# Altium PCB ROS_CAR.PcbDoc (part 5 of 13)
Units mil, origin at the board's own origin, x right, y up, seen from the top; angles counter-clockwise.
Board outline 3937.01 x 3937.01 mil, 2 copper layers (Top Layer, Bottom Layer); 201 components, 155 nets, 998 pads, 0 vias.
Unrouted connection lines stored in the file: 3.
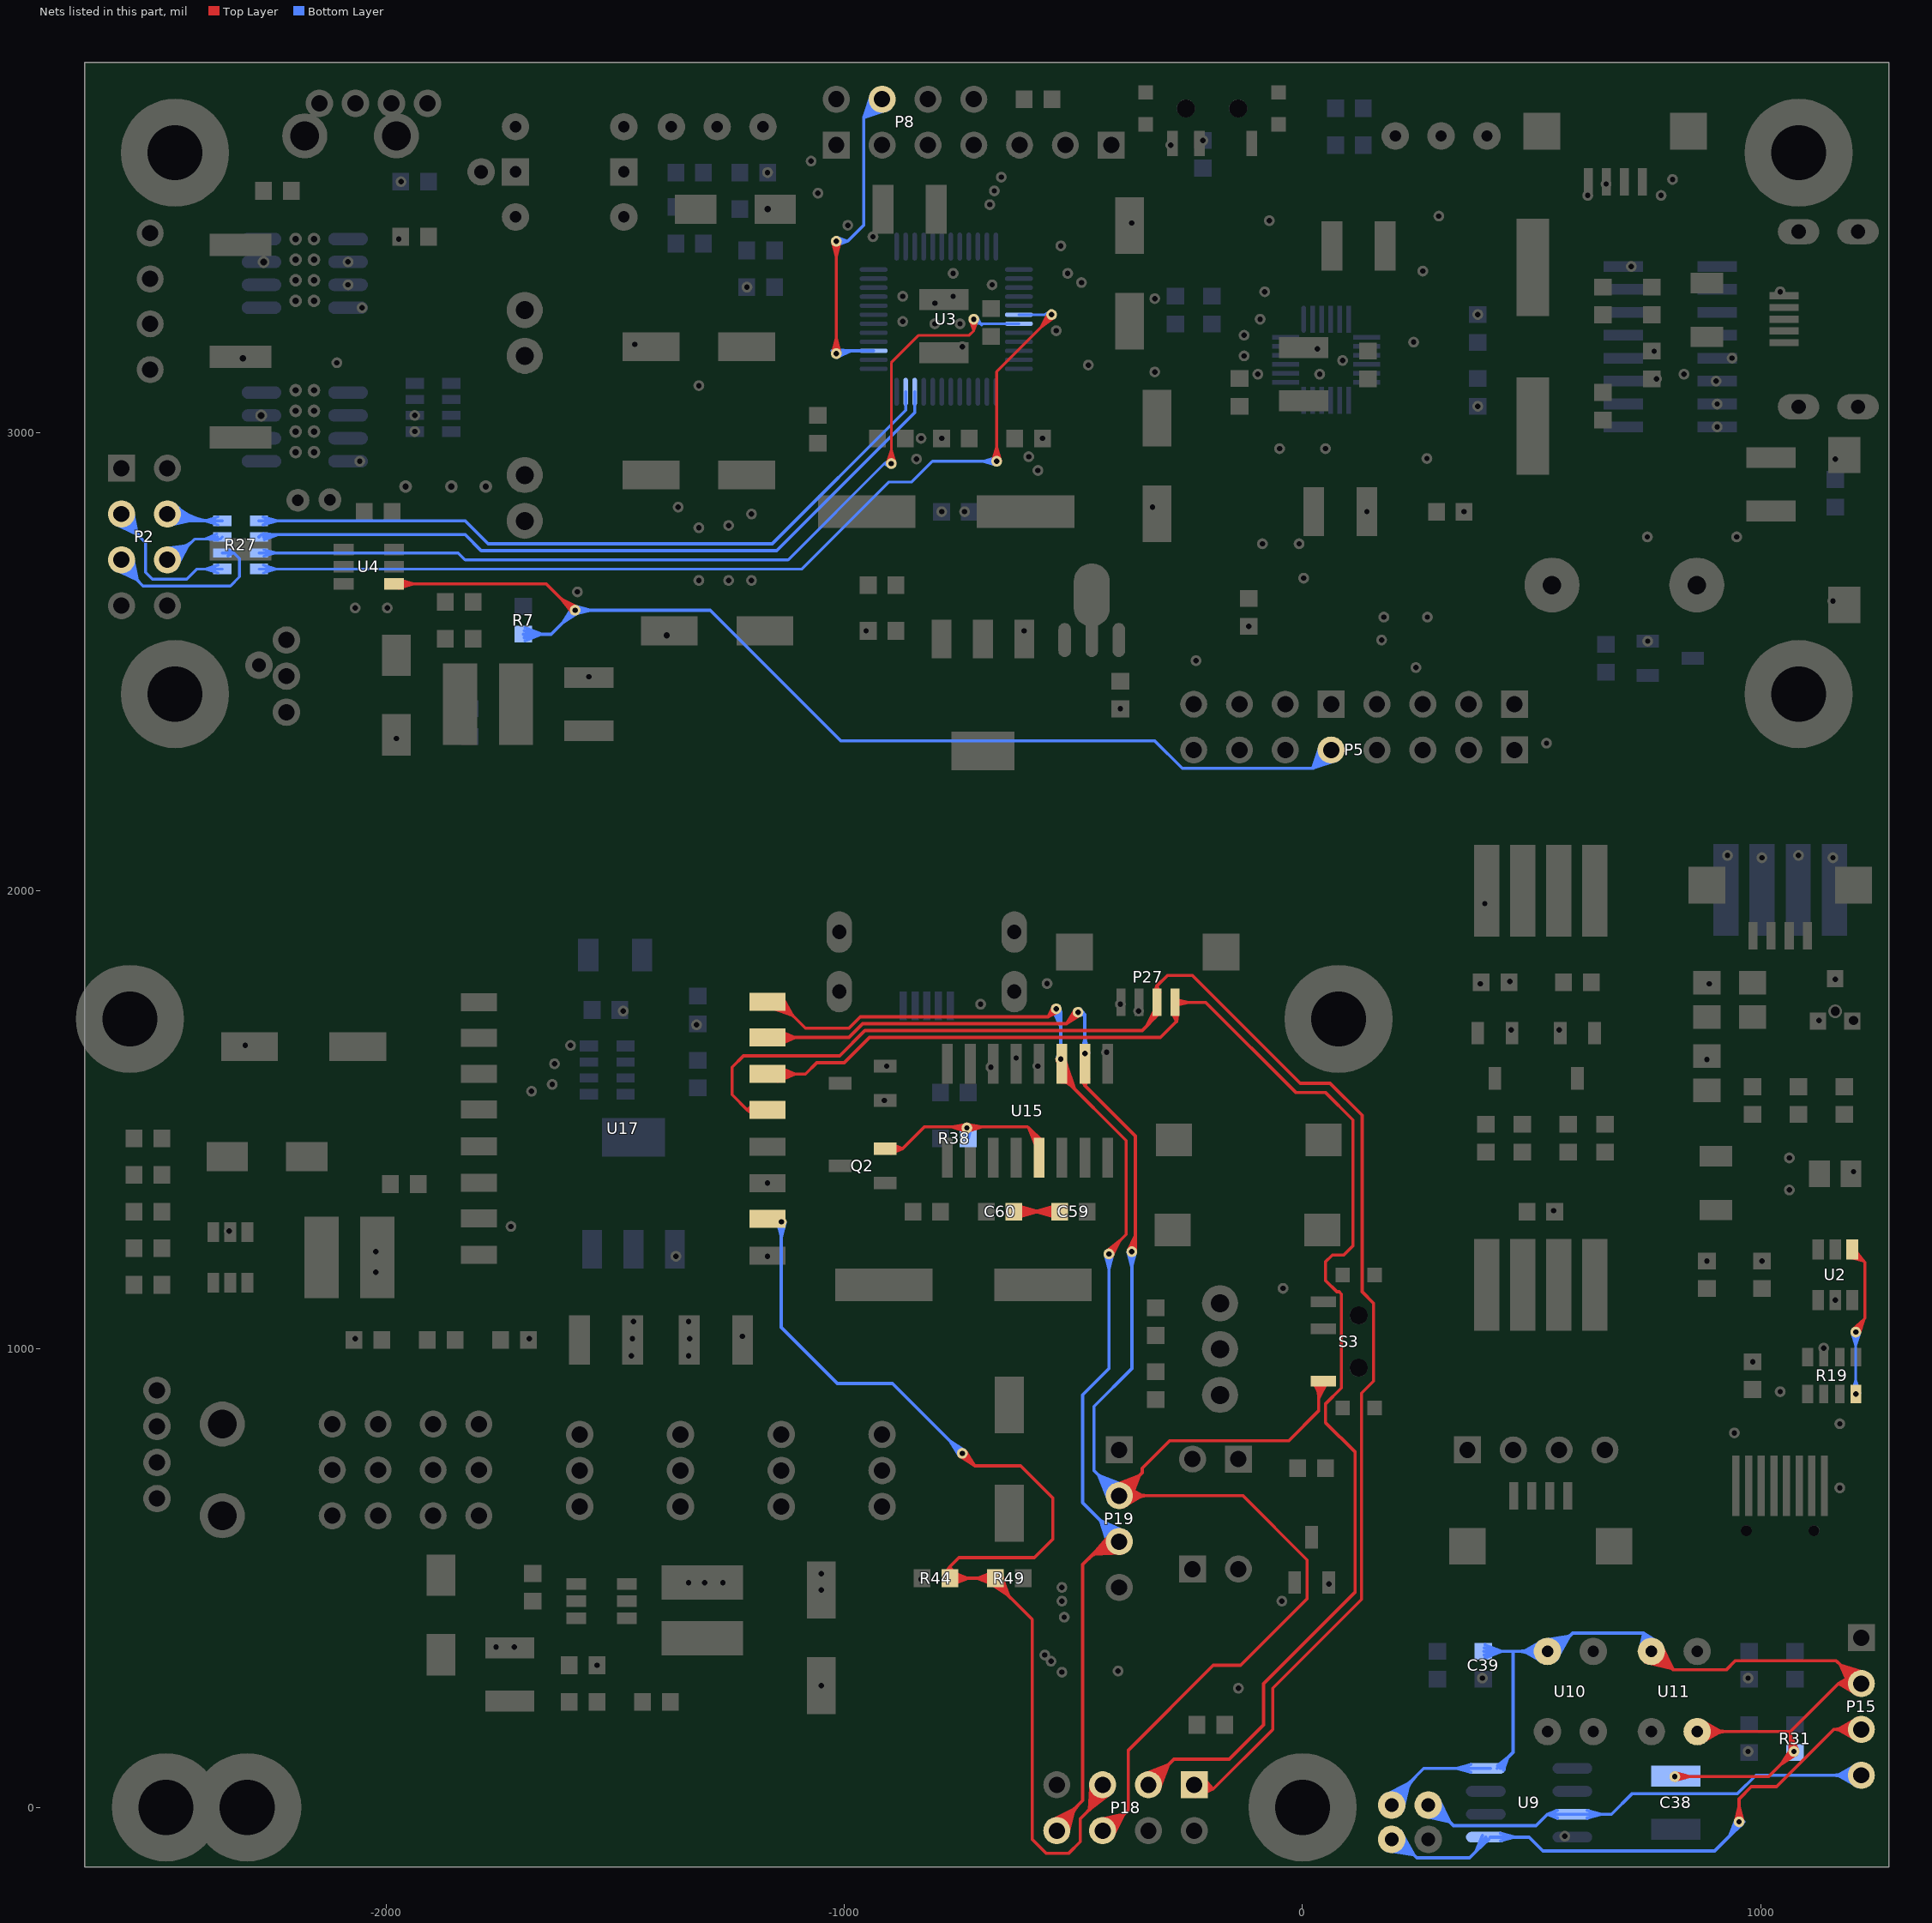
[diagram p5: the nets of this part, all layers, seen from the top]

## Nets (pads, with @x,y where several pads share a name; then routed paths per layer and width w, separated by ;. In a path a pad name is that pad's centre, name@x,y a point inside that pad or via, vN(x,y) a via of type N, cw(c..) or ccw(c..) an arc to the next point about the centre after c; other vN are vias at no path point) (continued)
CK1: P15.3 pad.0@194.53,-69.92 pad.1@952.84,-31.61 U9.1 | length 3017.9
  Top Layer w7: pad.1@944.6,-30.56 952.84,1.2 pad.1@961.08,-30.56 ; pad.1@946.96,-25.73 ccw(c932.78,-11.54) 952.84,-11.54 ccw(c972.9,-11.54) pad.1@958.72,-25.73 ; pad.1@952.84,-31.61 952.84,18.39 979.53,45.08 1034.53,45.08 1159.53,170.08 ; P15.3@1200.52,152.3 ccw(c1159.53,113.94) 1159.53,170.08 ; P15.3@1200.52,187.86 cw(c1159.53,226.21) 1159.53,170.08 ; P15.3@1205.63,157.08 ccw(c1175.67,129.04) 1175.67,170.08 ccw(c1175.67,211.12) P15.3@1205.63,183.08 ; P15.3@1212.82,144.93 1169,170.08 ; P15.3@1212.82,195.23 1169,170.08 ; P15.3@1215.94,151.39 1169,170.08 ; P15.3@1215.94,188.77 1169,170.08 ; P15.3@1218.1,158.14 1169,170.08 ; P15.3@1218.1,182.02 1169,170.08 ; P15.3@1219.28,165.06 1169,170.08 ; P15.3@1219.28,175.1 1169,170.08 ; P15.3@1219.53,170.08 1169,170.08 ; P15.3@1224.53,170.08 1159.53,170.08
  Bottom Layer w7: pad.0@184.74,-94.55 243.1,-103.49 ; pad.0@186.24,-87.57 243.1,-103.49 ; pad.0@188.55,-80.9 243.1,-103.49 ; pad.0@191.61,-74.59 243.1,-103.49 ; pad.0@194.53,-69.92 243.1,-103.49 ; pad.0@195.1,-75.39 cw(c199.08,-113.12) 225.9,-86.29 ; pad.0@195.84,-82.35 cw(c201.05,-131.89) 236.28,-96.67 ; pad.0@196.57,-89.31 cw(c203.03,-150.67) 246.65,-107.04 ; pad.0@197.86,-65.55 243.1,-103.49 ; pad.0@202.68,-60.45 243.1,-103.49 ; pad.0@204.53,-69.92 209.53,-69.92 249.53,-109.92 364.53,-109.92 U9.1@404.53,-69.92 ; pad.0@208.11,-55.93 243.1,-103.49 ; pad.0@214.1,-52.06 243.1,-103.49 ; pad.0@221.03,-69.92 ccw(c248.79,-69.92) 229.16,-89.55 ; U9.1@392.72,-60.98 378.79,-95.66 ; U9.1@400.04,-64.92 378.79,-95.66 ; U9.1@406.31,-70.38 378.79,-95.66 ; U9.1@410.04,-64.92 494.53,-64.92 524.53,-94.92 899.53,-94.92 pad.1@962.84,-31.61 ; U9.1@431.54,-64.92 464.35,-64.92 ; U9.1@432.59,-73.17 464.35,-64.92 ; U9.1@432.59,-56.68 464.35,-64.92 ; U9.1@437.41,-70.8 cw(c451.6,-84.99) 451.6,-64.92 cw(c451.6,-44.86) U9.1@437.41,-59.04 ; 931.58,-62.87 ccw(c900.32,-31.61) pad.1@944.53,-31.61 ; 943.53,-50.92 ccw(c924.22,-31.61) pad.1@951.53,-31.61 ; pad.1@945.49,-27.72 931.6,-62.85 ; pad.1@952.84,-31.61 931.6,-62.85 ; pad.1@959.16,-37.01 931.6,-62.85
CK2: P15.4 pad.0@274.53,5.08 U9.7 | length 2544.5
  Bottom Layer w7: pad.0@263.11,-18.84 321.77,-32.16 ; pad.0@265.1,-11.99 321.77,-32.16 ; pad.0@267.85,-5.49 321.77,-32.16 ; pad.0@271.32,0.61 321.77,-32.16 ; pad.0@274.53,5.08 321.77,-32.16 ; pad.0@274.9,-7.42 cw(c276.37,-57.2) 311.59,-21.98 ; pad.0@275.1,-14.41 cw(c277.03,-79.48) 323.06,-33.45 ; pad.0@278.13,9.24 321.77,-32.16 ; pad.0@283.24,14.04 321.77,-32.16 ; pad.0@284.53,5.08 329.53,-39.92 509.53,-39.92 534.53,-14.92 ; pad.0@288.92,18.23 321.77,-32.16 ; pad.0@294.03,5.08 ccw(c316.96,5.08) 300.75,-11.14 ; pad.0@295.11,21.76 321.77,-32.16 ; pad.0@301.03,5.08 ccw(c340.86,5.08) 312.69,-23.09 ; U9.7@551.64,-20.8 ccw(c537.46,-34.99) 537.46,-14.92 ccw(c537.46,5.14) U9.7@551.64,-9.04 ; U9.7@556.02,-23.1 534.53,-14.92 ; U9.7@556.02,-6.75 534.53,-14.92 ; U9.7@557.52,-14.92 534.53,-14.92 ; U9.7@620.51,-14.92 653.32,-14.92 ; U9.7@621.56,-23.17 653.32,-14.92 ; U9.7@621.56,-6.68 653.32,-14.92 ; U9.7@626.39,-20.8 cw(c640.58,-34.99) 640.58,-14.92 cw(c640.58,5.14) U9.7@626.39,-9.04 ; P15.4@1201.12,51.67 ccw(c1156.69,7.24) 1156.69,70.08 ccw(c1156.69,132.91) P15.4@1201.12,88.48 ; P15.4@1206.07,56.62 ccw(c1173.59,24.14) 1173.59,70.08 ccw(c1173.59,116.02) P15.4@1206.07,83.53 ; P15.4@1212.82,44.93 1169,70.08 ; P15.4@1212.82,95.23 1169,70.08 ; P15.4@1215.94,51.39 1169,70.08 ; P15.4@1215.94,88.77 1169,70.08 ; P15.4@1218.1,58.14 1169,70.08 ; P15.4@1218.1,82.02 1169,70.08 ; P15.4@1219.28,65.06 1169,70.08 ; P15.4@1219.28,75.1 1169,70.08 ; P15.4@1219.53,70.08 1169,70.08 ; P15.4@1224.53,70.08 989.53,70.08 949.53,30.08 719.53,30.08 674.53,-14.92 534.53,-14.92
CSN: P8.4 pad.1@-1017.48,3172.09 pad.1@-1017.48,3417.09 U3.15 | length 1841.7
  Top Layer w7: pad.1@-1025.72,3173.14 -1017.48,3204.9 pad.1@-1009.24,3173.14 ; pad.1@-1025.72,3416.03 -1017.48,3384.28 ; pad.1@-1023.36,3177.96 ccw(c-1037.54,3192.15) -1017.48,3192.15 ccw(c-997.42,3192.15) pad.1@-1011.6,3177.96 ; pad.1@-1023.36,3411.21 cw(c-1037.54,3397.02) -1017.48,3397.02 cw(c-997.42,3397.02) pad.1@-1011.6,3411.21 ; pad.1@-1017.48,3172.09 pad.1@-1017.48,3417.09 -1017.48,3384.28 ; pad.1@-1009.24,3416.03 -1017.48,3384.28
  Bottom Layer w7: pad.1@-1026.38,3178.19 U3.15@-935.94,3178.19 ; pad.1@-1017.96,3180.38 -984.02,3178.19 ; pad.1@-1017.48,3172.09 -984.02,3178.19 ; pad.1@-1017.48,3417.09 -992.91,3417.09 ; pad.1@-1016.55,3171.16 cw(c-999.58,3154.19) -999.58,3178.19 ; pad.1@-1016.07,3408.9 -992.91,3417.09 ; pad.1@-1016.07,3425.28 -992.91,3417.09 ; pad.1@-1015,3164.15 -984.02,3178.19 ; pad.1@-1011.6,3166.21 cw(c-982.68,3137.29) -982.68,3178.19 ; pad.1@-1011.6,3411.21 cw(c-997.42,3397.02) -997.42,3417.09 cw(c-997.42,3437.15) pad.1@-1011.6,3422.96 ; -987.46,3178.19 U3.15@-961.53,3178.19 ; P8.4@-943.43,3725.08 cw(c-991.74,3721.35) -957.48,3687.09 ; P8.4@-939.62,3740.76 -957.48,3687.09 ; P8.4@-936.45,3725.62 cw(c-971.77,3722.89) -946.72,3697.85 cw(c-921.67,3672.8) P8.4@-918.95,3708.12 ; P8.4@-933.01,3738.09 -957.48,3687.09 ; P8.4@-926.84,3734.64 -957.48,3687.09 ; P8.4@-921.19,3730.48 -957.48,3687.09 ; P8.4@-919.48,3701.14 ccw(c-923.22,3652.83) -957.48,3687.09 ; P8.4@-914.09,3723.38 -957.48,3687.09 ; P8.4@-909.93,3717.73 -957.48,3687.09 ; P8.4@-906.48,3711.56 -957.48,3687.09 ; P8.4@-903.8,3704.94 -957.48,3687.09 ; -992.91,3417.09 -957.48,3452.52 -957.48,3687.09 ; -957.48,3687.09 P8.4@-917.48,3727.09 -957.48,3687.09
DTR: pad.1@-732.5,1482.5 Q2.2 R38.1 U15.13 | length 2793.5
  Top Layer w7: Q2.2@-910.79,1437.4 -872.6,1437.4 ; -758.6,1485 cw(c-758.6,1456.4) pad.1@-738.38,1476.62 ; -746.53,1485 ccw(c-746.53,1496.53) pad.1@-738.38,1488.38 ; pad.1@-734.16,1474.36 -765.51,1485 ; pad.1@-732.92,1490.8 -765.51,1485 ; pad.1@-732.08,1490.8 -699.47,1485 ; pad.1@-730.84,1474.36 -699.47,1485 ; pad.1@-726.62,1476.62 cw(c-706.4,1456.4) -706.4,1485 ; pad.1@-726.62,1488.38 ccw(c-718.47,1496.53) -718.47,1485 ; -596.87,1481.87 cw(c-629.61,1449.13) U15.13@-583.31,1449.13 ; -584.92,1469.92 cw(c-605.71,1449.13) U15.13@-576.31,1449.13 ; U15.13@-582.34,1445.23 -597.36,1482.36 ; U15.13@-575,1449.13 -597.36,1482.36 ; U15.13@-570,1435 -570,1455 -600,1485 -825,1485 -872.6,1437.4 ; U15.13@-568.62,1454.46 -597.36,1482.36 ; Q2.2@-899.96,1437.4 -872.6,1437.4 ; Q2.2@-899.96,1437.4 -872.6,1437.4 ; Q2.2@-899.96,1437.4 -872.6,1437.4 ; Q2.2@-899.96,1437.4 -872.6,1437.4 ; Q2.2@-899.96,1437.4 -872.6,1437.4 ; Q2.2@-899.96,1437.4 -872.6,1437.4 ; Q2.2@-899.96,1437.4 -872.6,1437.4 ; Q2.2@-899.96,1437.4 -872.6,1437.4 ; Q2.2@-899.96,1437.4 -872.6,1437.4 ; Q2.2@-899.96,1437.4 -872.6,1437.4 ; Q2.2@-899.96,1437.4 -872.6,1437.4 ; Q2.2@-899.96,1437.4 -872.6,1437.4 ; Q2.2@-899.96,1437.4 -872.6,1437.4 ; Q2.2@-899.96,1437.4 -872.6,1437.4 ; Q2.2@-899.96,1437.4 -872.6,1437.4 ; Q2.2@-899.96,1437.4 -872.6,1437.4 ; Q2.2@-899.96,1437.4 -872.6,1437.4 ; Q2.2@-899.96,1437.4 -872.6,1437.4 ; Q2.2@-899.96,1437.4 -872.6,1437.4 ; Q2.2@-899.96,1437.4 -872.6,1437.4 ; Q2.2@-899.96,1437.4 -872.6,1437.4 ; Q2.2@-898.03,1427.31 -872.6,1437.4 ; Q2.2@-898.03,1427.31 -872.6,1437.4 ; Q2.2@-898.03,1427.31 -872.6,1437.4 ; Q2.2@-898.03,1427.31 -872.6,1437.4 ; Q2.2@-898.03,1427.31 -872.6,1437.4 ; Q2.2@-898.03,1427.31 -872.6,1437.4 ; Q2.2@-898.03,1427.31 -872.6,1437.4 ; Q2.2@-898.03,1427.31 -872.6,1437.4 ; Q2.2@-898.03,1427.31 -872.6,1437.4 ; Q2.2@-898.03,1427.31 -872.6,1437.4 ; Q2.2@-898.03,1427.31 -872.6,1437.4 ; Q2.2@-898.03,1427.31 -872.6,1437.4 ; Q2.2@-898.03,1427.31 -872.6,1437.4 ; Q2.2@-898.03,1427.31 -872.6,1437.4 ; Q2.2@-898.03,1427.31 -872.6,1437.4 ; Q2.2@-898.03,1427.31 -872.6,1437.4 ; Q2.2@-898.03,1427.31 -872.6,1437.4 ; Q2.2@-898.03,1427.31 -872.6,1437.4 ; Q2.2@-898.03,1427.31 -872.6,1437.4 ; Q2.2@-898.03,1427.31 -872.6,1437.4 ; Q2.2@-898.03,1427.31 -872.6,1437.4 ; Q2.2@-898.03,1447.5 -872.6,1437.4 ; Q2.2@-898.03,1447.5 -872.6,1437.4 ; Q2.2@-898.03,1447.5 -872.6,1437.4 ; Q2.2@-898.03,1447.5 -872.6,1437.4 ; Q2.2@-898.03,1447.5 -872.6,1437.4 ; Q2.2@-898.03,1447.5 -872.6,1437.4 ; Q2.2@-898.03,1447.5 -872.6,1437.4 ; Q2.2@-898.03,1447.5 -872.6,1437.4 ; Q2.2@-898.03,1447.5 -872.6,1437.4 ; Q2.2@-898.03,1447.5 -872.6,1437.4 ; Q2.2@-898.03,1447.5 -872.6,1437.4 ; Q2.2@-898.03,1447.5 -872.6,1437.4 ; Q2.2@-898.03,1447.5 -872.6,1437.4 ; Q2.2@-898.03,1447.5 -872.6,1437.4 ; Q2.2@-898.03,1447.5 -872.6,1437.4 ; Q2.2@-898.03,1447.5 -872.6,1437.4 ; Q2.2@-898.03,1447.5 -872.6,1437.4 ; Q2.2@-898.03,1447.5 -872.6,1437.4 ; Q2.2@-898.03,1447.5 -872.6,1437.4 ; Q2.2@-898.03,1447.5 -872.6,1437.4 ; Q2.2@-898.03,1447.5 -872.6,1437.4 ; Q2.2@-892.69,1430.13 cw(c-875.14,1412.58) -875.14,1437.4 ; Q2.2@-892.69,1430.13 cw(c-875.14,1412.58) -875.14,1437.4 ; Q2.2@-892.69,1430.13 cw(c-875.14,1412.58) -875.14,1437.4 ; Q2.2@-892.69,1444.67 ccw(c-875.14,1462.22) -875.14,1437.4 ; Q2.2@-892.69,1444.67 ccw(c-875.14,1462.22) -875.14,1437.4 ; Q2.2@-892.69,1444.67 ccw(c-875.14,1462.22) -875.14,1437.4 ; -765.51,1485 pad.1@-732.5,1482.5 -699.47,1485
  Bottom Layer w7: pad.1@-740.42,1479.97 R38.1@-729.69,1460 ; R38.1@-737.59,1475.93 cw(c-750.04,1459.83) R38.1@-729.69,1459.83 ; R38.1@-729.69,1469.23 cw(c-719.23,1469.23) R38.1@-726.62,1476.62 ; pad.1@-724.2,1482 R38.1@-729.69,1460 ; R38.1@-729.69,1460 pad.1@-732.5,1482.5 -729.69,1479.69 R38.1@-729.69,1460
E_RX: P18.8 P19.3 pad.1@-422.5,1207.5 pad.1@-527.5,1632.5 pad.1@-537.5,1742.5 U15.3 U17.16 | length 6744.8
  Top Layer w7: U17.16@-1167.56,1757.56 -1142.56,1757.56 -1085,1700 -990,1700 -965,1725 -555,1725 ; U17.16@-1155.92,1743.51 -1113.6,1728.6 ; U17.16@-1153.05,1749.97 -1113.6,1728.6 ; U17.16@-1147.87,1741.37 cw(c-1147.87,1689.47) -1111.17,1726.17 ; U17.16@-1147.87,1748.37 cw(c-1147.87,1713.37) -1123.12,1738.12 ; U17.16@-1147.87,1757.56 -1113.6,1728.6 ; U17.16@-1141.26,1763.93 -1113.6,1728.6 ; U17.16@-1135.37,1767.84 -1113.6,1728.6 ; U17.16@-1131.69,1757.56 ccw(c-1105.45,1757.56) -1124,1739 ; P18.8@-552.58,-30.48 -498.58,-3.58 ; P18.8@-549.03,-36.66 -498.58,-3.58 ; pad.1@-545.81,1742.5 cw(c-565.88,1742.5) -551.69,1728.31 cw(c-537.5,1714.12) pad.1@-537.5,1734.19 ; P18.8@-544.82,-42.32 -498.58,-3.58 ; pad.1@-544.28,1747.31 -555,1725 ; P18.8@-540.02,-47.43 -498.58,-3.58 ; P18.8@-536.22,-31.7 ccw(c-536.22,-8.7) -519.96,-24.96 ; P18.8@-536.22,-24.7 ccw(c-536.22,15.19) -508.01,-13.01 ; U15.3@-535.81,1632.79 U15.3@-532.16,1618.15 ; U15.3@-535.65,1630.86 U15.3@-525,1598.97 ; U15.3@-535.01,1628.93 -509.54,1585.05 ; U15.3@-534.72,1628.39 U15.3@-514.09,1600.56 ; U15.3@-534.21,1627.6 -508.38,1599.26 ; U15.3@-533.38,1626.62 cw(c-553.6,1606.4) U15.3@-525,1606.4 ; pad.1@-532.69,1735.72 -555,1725 ; P18.8@-532.16,-53.69 -498.58,-3.58 ; P18.8@-526.12,-57.25 -498.58,-3.58 ; U15.3@-525,1582.55 cw(c-525,1552.51) -503.76,1573.76 ; U15.3@-525,1618.47 cw(c-513.47,1618.47) U15.3@-521.62,1626.62 ; P18.8@-524.19,-50.72 cw(c-472.21,-50.72) -508.97,-13.97 ; U15.3@-520.61,1627.85 U15.3@-532.16,1618.15 ; U15.3@-519.89,1635.84 -508.38,1599.26 ; P18.8@-519.66,-60.1 -498.58,-3.58 ; U15.3@-519.2,1632.09 U15.3@-525,1598.97 ; U15.3@-517.33,1625.57 -497.6,1567.6 ; P18.8@-517.19,-50.72 cw(c-448.31,-50.72) -497.02,-2.02 ; U15.3@-516.69,1590.87 ccw(c-506.6,1590.87) U15.3@-513.74,1583.74 ; P18.8@-512.86,-62.19 -498.58,-3.58 ; P18.8@-510.19,-50.72 cw(c-424.41,-50.72) -485.07,9.93 ; -471.29,538.71 cw(c-400.64,468.06) P19.3@-400.07,567.97 ; -459.44,550.56 cw(c-400.51,491.63) P19.3@-400.03,574.97 ; -447.58,562.42 cw(c-400.37,515.21) P19.3@-399.99,581.97 ; -435.73,574.27 cw(c-400.24,538.78) P19.3@-399.95,588.97 ; pad.1@-430,1205 -385,1250 -385,1455 -525,1595 U15.3@-525,1622.36 -497.6,1567.6 ; pad.1@-428.28,1213.47 -398.93,1236.07 ; pad.1@-422.5,1207.5 -398.93,1236.07 ; pad.1@-422.5,1215.81 ccw(c-422.5,1223.8) -416.85,1218.15 ; pad.1@-421.19,1207.5 cw(c-405.95,1207.5) -416.73,1218.27 ; P19.3@-415.81,600.67 -457.9,552.1 ; pad.1@-415.54,1202.96 -398.93,1236.07 ; pad.1@-414.19,1207.5 cw(c-382.05,1207.5) -404.78,1230.22 ; P19.3@-410.71,595.73 -457.9,552.1 ; P19.3@-406.21,590.3 -457.9,552.1 ; P19.3@-402.36,584.44 -457.9,552.1 ; P19.3@-400,580 -457.9,552.1 ; P19.3@-398,575.39 -457.9,552.1 ; P19.3@-395.82,568.72 -457.9,552.1 ; P19.3@-394.37,561.83 -457.9,552.1 ; P19.3@-393.68,554.75 -457.9,552.1 ; P19.3@-385,580 -430,580 -480,530 -480,15 -536.22,-41.22 P18.8@-536.22,-50.72 -498.58,-3.58 ; -555,1725 pad.1@-537.5,1742.5 -555,1725 ; U15.3@-532.16,1618.15 pad.1@-527.5,1632.5 ; U15.3@-532.16,1618.15 -497.6,1567.6 ; pad.1@-527.5,1632.5 U15.3@-525,1598.97 ; pad.1@-527.5,1632.5 -508.38,1599.26 ; pad.1@-527.5,1632.5 -509.54,1585.05 ; pad.1@-527.5,1632.5 U15.3@-514.09,1600.56 ; U15.3@-514.09,1600.56 -519.51,1634.77 -509.54,1585.05
  Bottom Layer w7: pad.1@-545.32,1739.69 -527.5,1702.39 ; pad.1@-543.38,1736.62 cw(c-581.71,1698.29) -527.5,1698.29 ; pad.1@-538.43,1741.57 cw(c-564.81,1715.19) -527.5,1715.19 ; pad.1@-535.74,1633.55 -527.5,1665.31 pad.1@-519.26,1633.55 ; pad.1@-533.48,1746.52 cw(c-547.91,1732.09) -527.5,1732.09 ; pad.1@-533.38,1638.38 ccw(c-547.56,1652.56) -527.5,1652.56 ccw(c-507.44,1652.56) pad.1@-521.62,1638.38 ; pad.1@-529.27,1743.69 -527.5,1702.39 ; pad.1@-527.5,1632.5 -527.5,1732.5 pad.1@-537.5,1742.5 -527.5,1702.39 ; -447.97,632.97 cw(c-500.93,580) P19.3@-426.03,580 ; -436.02,621.02 cw(c-477.03,580) P19.3@-419.03,580 ; -435.9,620.9 ccw(c-400,656.79) P19.3@-400,606.03 ; pad.1@-430.74,1206.45 -422.5,1174.69 pad.1@-414.26,1206.45 ; pad.1@-428.38,1201.62 cw(c-442.56,1187.44) -422.5,1187.44 cw(c-402.44,1187.44) pad.1@-416.62,1201.62 ; -424.07,609.07 cw(c-453.14,580) P19.3@-412.03,580 ; -423.95,608.95 ccw(c-400,632.89) P19.3@-400,599.03 ; P19.3@-422.64,567.17 -441.07,626.07 ; pad.1@-422.5,1207.5 -422.5,957.5 -480,900 -480,665 P19.3@-405,590 ; P19.3@-415.99,569.68 -441.07,626.07 ; P19.3@-409.72,572.91 -441.07,626.07 ; P19.3@-403.89,576.81 -441.07,626.07 ; P19.3@-400,580 -441.07,626.07 ; P19.3@-396.39,583.5 -441.07,626.07 ; P19.3@-391.84,588.84 -441.07,626.07 ; P19.3@-387.92,594.7 -441.07,626.07 ; P19.3@-384.66,601.03 -441.07,626.07
E_TX: P18.7 P19.2 pad.1@-372.5,1212.5 pad.1@-475,1645 pad.1@-490,1735 S3.1 U15.2 U17.15 | length 7670.5
  Top Layer w7: U17.15@-1155,1680 -990,1680 -960,1710 -515,1710 ; U17.15@-1147.87,1679.61 -1107.19,1680 ; U17.15@-1146.93,1688.74 -1107.19,1680 ; U17.15@-1146.75,1670.49 -1107.19,1680 ; U17.15@-1144.81,1695.5 -1107.19,1680 ; U17.15@-1144.5,1663.78 -1107.19,1680 ; U17.15@-1141.38,1673.11 cw(c-1124.75,1656.48) -1124.75,1680 ; U17.15@-1141.38,1686.1 ccw(c-1126.65,1700.83) -1126.65,1680 ; U17.15@-1136.43,1668.16 cw(c-1107.85,1639.58) -1107.85,1680 ; U17.15@-1136.43,1691.05 ccw(c-1109.75,1717.73) -1109.75,1680 ; pad.1@-498.31,1735 cw(c-518.38,1735) -504.19,1720.81 cw(c-490,1706.62) pad.1@-490,1726.69 ; pad.1@-496.53,1740.15 -515,1710 ; pad.1@-490,1735 -515,1710 ; pad.1@-485,1740 -515,1710 ; pad.1@-484.85,1728.47 -515,1710 ; U15.2@-483.02,1588.69 -475,1575 ; U15.2@-479.73,1584.03 cw(c-485.99,1575) -475,1575 ; U15.2@-475,1590.87 -475,1575 ; U15.2@-475,1622.36 -475,1575 ; U15.2@-470.27,1584.03 ccw(c-464.01,1575) -475,1575 ; U15.2@-466.98,1588.69 -475,1575 ; P18.7@-447.31,-27.18 -389.2,-14.2 ; P18.7@-445.34,-34.03 -389.2,-14.2 ; P18.7@-442.6,-40.53 -389.2,-14.2 ; P18.7@-439.13,-46.63 -389.2,-14.2 ; P18.7@-436.22,-50.72 -389.2,-14.2 ; P18.7@-435.22,-38.74 ccw(c-431.64,3.97) -401.34,-26.34 ; P18.7@-434.63,-31.76 ccw(c-429.99,23.65) -390.67,-15.67 ; P18.7@-434.05,-24.79 ccw(c-428.34,43.34) -380,-5 ; P18.7@-432.97,-54.56 -389.2,-14.2 ; P18.7@-427.92,-59.43 -389.2,-14.2 ; P18.7@-425,-50 -380,-5 ; P18.7@-422.3,-63.69 -389.2,-14.2 ; P18.7@-416.15,-67.29 -389.2,-14.2 ; P19.2@-414.19,701.82 -355.62,724.38 ; P19.2@-411.26,695.34 -355.62,724.38 ; P18.7@-410.19,-50.72 cw(c-372.7,-50.72) -399.21,-24.21 ; P19.2@-407.65,689.28 -355.62,724.38 ; P19.2@-403.41,683.69 -355.62,724.38 ; P19.2@-400,699.03 ccw(c-400,744.96) -367.52,712.48 ccw(c-335.04,680) P19.2@-380.97,680 ; P19.2@-400,706.03 ccw(c-400,768.86) -355.57,724.43 ccw(c-311.14,680) P19.2@-373.97,680 ; P19.2@-399.75,674.98 -349.47,680 ; P19.2@-399.75,685.02 -349.47,680 ; P19.2@-398.57,668.06 -349.47,680 ; P19.2@-398.57,691.94 -349.47,680 ; P19.2@-396.42,661.31 -349.47,680 ; P19.2@-396.42,698.69 -349.47,680 ; P19.2@-396.31,676.59 -355.62,724.38 ; P19.2@-395,655 -395,685 -350,730 -350,740 -290,800 -30,800 35,865 S3.1@35,925 ; P19.2@-393.3,654.85 -349.47,680 ; P19.2@-393.3,705.15 -349.47,680 ; P19.2@-390.72,672.35 -355.62,724.38 ; P19.2@-386.55,666.55 cw(c-354.06,634.06) -354.06,680 cw(c-354.06,725.94) P19.2@-386.55,693.45 ; P19.2@-384.66,668.74 -355.62,724.38 ; P19.2@-381.6,661.6 cw(c-337.16,617.16) -337.16,680 cw(c-337.16,742.84) P19.2@-381.6,698.4 ; pad.1@-380.36,1215.19 -365,1247.31 ; pad.1@-380,1210 -365,1225 ; pad.1@-378.38,1218.38 ccw(c-410.67,1250.67) -365,1250.67 ; P19.2@-378.18,665.81 -355.62,724.38 ; pad.1@-373.43,1213.43 ccw(c-393.77,1233.77) -365,1233.77 ; pad.1@-372.5,1220.81 ccw(c-372.5,1228.8) -366.85,1223.15 ; pad.1@-365.68,1217.26 cw(c-360.72,1220.72) -365,1225 ; pad.1@-364.23,1211.71 -365,1247.31 ; S3.1@24.12,923.89 cw(c-2.14,897.63) 35,897.63 ; S3.1@29.07,928.84 cw(c14.76,914.53) 35,914.53 ; S3.1@37.56,931.21 35,892.74 ; S3.1@45.75,929.76 35,892.74 ; S3.1@53.43,926.6 35,892.74 ; -475,1575 -365,1465 -365,1225 ; -380,-5 -380,125 -195,310 -135,310 10,455 10,540 -130,680 P19.2@-400,680 -355.62,724.38 ; pad.1@-372.5,1212.5 -365,1225 ; pad.1@-372.5,1212.5 -365,1247.31 ; pad.1@-372.5,1212.5 -365,1225 ; -365,1225 -364.45,1210.43 -365,1225 ; -365,1225 -378.11,1218.63 -365,1225
  Bottom Layer w7: pad.1@-490.46,1726.7 -475,1730 ; pad.1@-489.41,1733.83 cw(c-484.5,1724.15) -476.83,1731.83 ; pad.1@-485.39,1741.92 -475,1730 ; pad.1@-483.24,1646.05 -475,1677.81 pad.1@-466.76,1646.05 ; pad.1@-480.88,1650.88 ccw(c-495.06,1665.06) -475,1665.06 ccw(c-454.94,1665.06) pad.1@-469.12,1650.88 ; pad.1@-475,1645 -475,1730 ; P19.2@-426.03,680 ccw(c-488.86,680) -444.43,724.43 ccw(c-400,768.86) P19.2@-400,706.03 ; P19.2@-421.82,665.81 -444.38,724.38 ; P19.2@-419.03,680 ccw(c-464.96,680) -432.48,712.48 ccw(c-400,744.96) P19.2@-400,699.03 ; P19.2@-415.34,668.74 -444.38,724.38 ; P19.2@-409.28,672.35 -444.38,724.38 ; P19.2@-403.69,676.59 -444.38,724.38 ; P19.2@-396.59,683.69 -444.38,724.38 ; P19.2@-392.35,689.28 -444.38,724.38 ; P19.2@-388.74,695.34 -444.38,724.38 ; P19.2@-385.81,701.82 -444.38,724.38 ; pad.1@-380.74,1211.45 -372.5,1179.69 pad.1@-364.26,1211.45 ; pad.1@-378.38,1206.62 cw(c-392.56,1192.44) -372.5,1192.44 cw(c-352.44,1192.44) pad.1@-366.62,1206.62 ; pad.1@-372.5,1212.5 -372.5,957.5 -455,875 -455,735 P19.2@-400,680 -444.38,724.38 ; -475,1730 pad.1@-490,1735 -480,1735 -475,1730
EC1-A: pad.1@-547.48,3257.09 pad.1@-667.48,2937.09 R27.5 U3.42 | length 2737.8
  Top Layer w6: pad.1@-676.19,2938.39 -667.48,2966.9 ; pad.1@-673.71,2943.32 ccw(c-688.75,2958.36) -667.48,2958.36 ccw(c-646.21,2958.36) pad.1@-661.25,2943.32 ; pad.1@-667.48,2937.09 -667.48,2966.9 ; pad.1@-667.48,2942.09 -667.48,3132.52 -554.39,3245.61 ; pad.1@-658.77,2938.39 -667.48,2966.9 ; -565.75,3234.25 ccw(c-588.59,3257.09) pad.1@-556.29,3257.09 ; -555.51,3244.49 ccw(c-568.1,3257.09) pad.1@-550.29,3257.09 ; pad.1@-554.9,3261.85 -570.29,3229.71 ; -554.73,3245.27 cw(c-547.48,3238.03) pad.1@-547.48,3248.28 ; pad.1@-547.48,3257.09 -570.29,3229.71 ; pad.1@-541.46,3250.65 -570.29,3229.71
  Bottom Layer w6: R27.5@-2277.48,2702.09 -1092.48,2702.09 -902.48,2892.09 -852.48,2892.09 -807.48,2937.09 pad.1@-667.48,2937.09 -697.29,2937.09 ; R27.5@-2269.29,2702.09 -2239.48,2702.09 ; R27.5@-2267.99,2693.37 -2239.48,2702.09 ; R27.5@-2267.99,2710.8 -2239.48,2702.09 ; R27.5@-2263.06,2695.86 cw(c-2248.02,2680.82) -2248.02,2702.09 cw(c-2248.02,2723.36) R27.5@-2263.06,2708.32 ; pad.1@-673.71,2930.86 ccw(c-688.75,2915.82) -688.75,2937.09 ccw(c-688.75,2958.36) pad.1@-673.71,2943.32 ; pad.1@-668.78,2928.37 -697.29,2937.09 ; pad.1@-668.78,2945.8 -697.29,2937.09 ; U3.42@-619.02,3256.93 -562.64,3256.93 -562.48,3257.09 ; U3.42@-593.43,3256.93 -570.5,3256.93 ; pad.1@-555.18,3252.8 ccw(c-562.48,3248.73) -562.48,3257.09 ; pad.1@-555.18,3261.38 cw(c-562.48,3265.45) -562.48,3257.09 ; pad.1@-550.07,3248.66 -562.48,3257.09 ; pad.1@-550.07,3265.51 -562.48,3257.09 ; -562.48,3257.09 pad.1@-547.48,3257.09 -562.48,3257.09
EC1-B: pad.1@-717.48,3247.09 pad.1@-897.48,2932.09 R27.6 U3.43 | length 2534
  Top Layer w6: pad.1@-906.19,2933.39 -897.48,2961.9 ; pad.1@-903.71,2938.32 ccw(c-918.75,2953.36) -897.48,2953.36 ccw(c-876.21,2953.36) pad.1@-891.25,2938.32 ; pad.1@-897.48,2927.09 -897.48,3152.09 -837.48,3212.09 -727.48,3212.09 -717.48,3222.09 ; pad.1@-897.48,2932.09 -897.48,2961.9 ; pad.1@-888.77,2933.39 -897.48,2961.9 ; pad.1@-726.15,3245.53 -717.48,3222.09 ; pad.1@-723.71,3240.86 cw(c-738.75,3225.82) -717.48,3225.82 cw(c-696.21,3225.82) pad.1@-711.25,3240.86 ; pad.1@-708.81,3245.53 -717.48,3222.09 ; -717.48,3222.09 pad.1@-717.48,3247.09 -717.48,3222.09
  Bottom Layer w6: R27.6@-2277.48,2737.09 -1842.48,2737.09 -1827.48,2722.09 -1122.48,2722.09 -912.48,2932.09 ; R27.6@-2267.48,2737.09 -2239.48,2737.09 ; R27.6@-2266.61,2730.14 -2239.48,2737.09 ; R27.6@-2266.61,2744.03 -2239.48,2737.09 ; R27.6@-2262.53,2732.14 cw(c-2250.58,2720.19) -2250.58,2737.09 cw(c-2250.58,2753.99) R27.6@-2262.53,2742.04 ; pad.1@-905.18,2927.8 ccw(c-912.48,2923.73) -912.48,2932.09 ; pad.1@-905.18,2936.38 cw(c-912.48,2940.45) -912.48,2932.09 ; pad.1@-900.07,2923.66 -912.48,2932.09 ; pad.1@-900.07,2940.51 -912.48,2932.09 ; pad.1@-720.38,3238.77 -702.64,3237.24 ; pad.1@-717.48,3247.09 -702.64,3237.24 ; pad.1@-715.06,3238.61 cw(c-710.89,3224) -700.14,3234.75 ; pad.1@-712.48,3247.09 -702.64,3237.24 ; pad.1@-710.95,3253 -702.64,3237.24 ; pad.1@-708.67,3247.09 ccw(c-699.47,3247.09) -705.97,3240.58 ; -667.53,3237.24 U3.43@-644.61,3237.24 ; U3.43@-619.02,3237.24 -702.64,3237.24 ; -912.48,2932.09 pad.1@-897.48,2932.09 -912.48,2932.09
EC1_A: P2.3 R27.4 | length 1195.9
  Bottom Layer w6: P2.3@-2594.06,2801.38 -2542.43,2777.04 ; P2.3@-2591.15,2806.77 -2542.43,2777.04 ; P2.3@-2587.72,2811.78 -2542.43,2777.04 ; P2.3@-2583.8,2816.36 -2542.43,2777.04 ; P2.3@-2577.48,2795.56 cw(c-2577.48,2755.66) -2549.27,2783.87 ; P2.3@-2577.48,2801.56 cw(c-2577.48,2776.14) -2559.51,2794.12 ; P2.3@-2577.48,2812.09 -2525,2759.61 -2525,2695 -2510,2680 -2435,2680 -2412.91,2702.09 R27.4@-2357.48,2702.09 ; P2.3@-2577.48,2822.09 -2542.43,2777.04 ; P2.3@-2570.38,2826.81 -2542.43,2777.04 ; P2.3@-2568.97,2821.53 ccw(c-2531.72,2819.12) -2558.12,2792.72 ; P2.3@-2564.97,2829.48 -2542.43,2777.04 ; P2.3@-2562.98,2821.15 ccw(c-2514.12,2817.97) -2548.75,2783.35 ; P2.3@-2559.28,2831.57 -2542.43,2777.04 ; P2.3@-2557,2820.76 ccw(c-2496.53,2816.83) -2539.37,2773.98 ; P2.3@-2553.33,2833.06 -2542.43,2777.04 ; P2.3@-2551.01,2820.37 ccw(c-2478.93,2815.69) -2530,2764.61 ; R27.4@-2371.9,2695.86 ccw(c-2386.94,2680.82) -2386.94,2702.09 ccw(c-2386.94,2723.36) R27.4@-2371.9,2708.32 ; R27.4@-2366.97,2693.37 -2395.48,2702.09 ; R27.4@-2366.97,2710.8 -2395.48,2702.09 ; R27.4@-2365.67,2702.09 -2395.48,2702.09
EC1_B: P2.5 R27.3 | length 1159.8
  Bottom Layer w6: P2.5@-2594.04,2701.37 -2542.68,2677.29 ; P2.5@-2591.15,2706.77 -2542.68,2677.29 ; P2.5@-2587.72,2711.78 -2542.68,2677.29 ; P2.5@-2583.8,2716.36 -2542.68,2677.29 ; P2.5@-2577.48,2695.56 cw(c-2577.48,2655.66) -2549.27,2683.87 ; P2.5@-2577.48,2701.56 cw(c-2577.48,2676.14) -2559.51,2694.12 ; P2.5@-2577.48,2712.09 -2530.39,2665 -2340,2665 -2320,2685 -2320,2725 -2332.09,2737.09 ; P2.5@-2577.48,2722.09 -2542.68,2677.29 ; P2.5@-2570.37,2726.8 -2542.68,2677.29 ; P2.5@-2569.05,2720.82 ccw(c-2539.47,2716.37) -2560.62,2695.23 ; P2.5@-2564.96,2729.46 -2542.68,2677.29 ; P2.5@-2563.11,2719.93 ccw(c-2524.86,2714.18) -2552.21,2686.82 ; P2.5@-2559.26,2731.54 -2542.68,2677.29 ; P2.5@-2557.18,2719.04 ccw(c-2510.24,2711.98) -2543.8,2678.41 ; P2.5@-2553.31,2733.01 -2542.68,2677.29 ; P2.5@-2551.25,2718.14 ccw(c-2495.62,2709.78) -2535.4,2670 ; R27.3@-2357.48,2737.09 -2332.09,2737.09 ; R27.3@-2347.48,2737.09 -2332.09,2737.09 ; R27.3@-2345.89,2730.27 -2332.09,2737.09 ; R27.3@-2345.89,2743.9 -2332.09,2737.09 ; R27.3@-2342.21,2732.49 cw(c-2332.09,2723.66) -2332.09,2737.09 ; R27.3@-2342.21,2741.69 ccw(c-2332.09,2750.51) -2332.09,2737.09
EC2-A: R27.7 U3.10 | length 1772.3
  Bottom Layer w7: R27.7@-2277.48,2772.09 -2272.48,2777.09 -1827.48,2777.09 -1792.48,2742.09 -1147.48,2742.09 -846.38,3043.19 ; R27.7@-2267.84,2772.44 cw(c-2256.62,2761.22) -2256.62,2777.09 ; R27.7@-2267.84,2778.58 -2235.74,2777.09 ; R27.7@-2267.48,2772.09 -2235.74,2777.09 ; R27.7@-2265.83,2765.8 -2235.74,2777.09 ; R27.7@-2262.89,2767.49 cw(c-2239.72,2744.32) -2239.72,2777.09 ; U3.10@-846.38,3063.03 -846.38,3043.19 ; U3.10@-846.38,3088.62 -846.38,3043.19
EC2-B: R27.8 U3.11 | length 1737.4
  Bottom Layer w7: R27.8@-2277.48,2807.09 -1827.48,2807.09 -1777.48,2757.09 -1157.48,2757.09 -866.06,3048.5 ; R27.8@-2269.29,2807.09 -2236.48,2807.09 ; R27.8@-2268.24,2798.84 -2236.48,2807.09 ; R27.8@-2268.24,2815.33 -2236.48,2807.09 ; R27.8@-2263.42,2801.21 cw(c-2249.23,2787.02) -2249.23,2807.09 cw(c-2249.23,2827.15) R27.8@-2263.42,2812.96 ; U3.11@-866.06,3063.03 -866.06,3048.5 ; U3.11@-866.06,3088.62 -866.06,3048.5
EC2_A: P2.4 R27.1 | length 1094.7
  Bottom Layer w6: P2.4@-2482.91,2807.09 R27.1@-2357.48,2807.09 ; P2.4@-2479.94,2819.63 ccw(c-2449.65,2849.92) -2449.65,2807.09 ccw(c-2449.65,2794.26) P2.4@-2458.72,2803.33 ; P2.4@-2479.71,2807.73 -2428.17,2807.09 ; P2.4@-2479.42,2801.65 -2428.17,2807.09 ; P2.4@-2479.28,2813.75 -2428.17,2807.09 ; P2.4@-2478.41,2795.58 -2428.17,2807.09 ; P2.4@-2477.48,2822.09 -2428.17,2807.09 ; P2.4@-2475.69,2823.87 ccw(c-2435.16,2864.4) -2435.16,2807.09 ; P2.4@-2474.33,2830.01 -2428.17,2807.09 ; P2.4@-2471.45,2828.12 ccw(c-2420.68,2878.89) -2420.68,2807.09 ; P2.4@-2471.34,2835.25 -2428.17,2807.09 ; P2.4@-2467.72,2840.14 -2428.17,2807.09 ; P2.4@-2467.21,2832.36 ccw(c-2406.19,2893.37) -2406.19,2807.09 ; P2.4@-2463.49,2844.62 -2428.17,2807.09 ; P2.4@-2462.97,2836.6 ccw(c-2391.71,2907.86) -2391.71,2807.09 ; P2.4@-2458.72,2840.84 ccw(c-2377.22,2922.34) R27.1@-2377.22,2807.09 ; R27.1@-2371.9,2800.86 ccw(c-2386.94,2785.82) -2386.94,2807.09 ccw(c-2386.94,2828.36) R27.1@-2371.9,2813.32 ; R27.1@-2366.97,2798.37 -2395.48,2807.09 ; R27.1@-2366.97,2815.8 -2395.48,2807.09 ; R27.1@-2365.67,2807.09 -2395.48,2807.09
EC2_B: P2.6 R27.2 | length 998.2
  Bottom Layer w6: P2.6@-2486.83,2746.91 -2431.36,2753.64 ; P2.6@-2485.76,2740.87 -2431.36,2753.64 ; P2.6@-2484.05,2735.04 -2431.36,2753.64 ; P2.6@-2481.74,2729.47 -2431.36,2753.64 ; P2.6@-2480,2705 -2417.91,2767.09 ; P2.6@-2477.48,2722.09 -2431.36,2753.64 ; P2.6@-2476.3,2730.53 ccw(c-2470.93,2768.99) -2443.47,2741.53 ; P2.6@-2475.47,2736.47 ccw(c-2468.84,2783.93) -2434.95,2750.05 ; P2.6@-2474.64,2742.42 ccw(c-2466.75,2798.88) -2426.43,2758.57 ; P2.6@-2473.81,2748.36 ccw(c-2464.66,2813.83) -2417.92,2767.08 ; P2.6@-2472.14,2715.44 -2431.36,2753.64 ; P2.6@-2467.79,2711.26 -2431.36,2753.64 ; P2.6@-2462.97,2707.56 -2431.36,2753.64 ; P2.6@-2457.73,2704.37 -2431.36,2753.64 ; P2.6@-2450.95,2722.09 cw(c-2422.08,2722.09) -2442.5,2742.5 ; -2396.45,2767.09 ccw(c-2396.45,2801.06) R27.2@-2372.43,2777.04 ; -2381.97,2767.09 ccw(c-2381.97,2786.57) R27.2@-2368.19,2772.79 ; R27.2@-2369.53,2778.78 -2395.85,2767.09 ; R27.2@-2367.48,2772.09 -2395.85,2767.09 ; R27.2@-2367.11,2765.1 -2395.85,2767.09 ; R27.2@-2357.48,2772.09 -2362.48,2767.09 -2417.91,2767.09
EGND: C59.1 C60.1 | length 452.1
  Top Layer w10: C60.1@-629.68,1300 C59.1@-520,1300 ; C60.1@-627.85,1286.82 -581.38,1300 C60.1@-627.85,1313.18 ; C60.1@-620.28,1290.59 cw(c-597.56,1267.87) -597.56,1300 cw(c-597.56,1332.13) C60.1@-620.28,1309.41 ; C59.1@-539.72,1290.59 ccw(c-562.44,1267.87) -562.44,1300 ccw(c-562.44,1332.13) C59.1@-539.72,1309.41 ; C59.1@-532.15,1286.82 -578.62,1300 ; C59.1@-532.15,1313.18 -578.62,1300 ; C59.1@-530.32,1300 -578.62,1300
EN: P5.5 pad.1@-1587.48,2612.09 R7.1 U4.4 | length 3829.8
  Top Layer w7: U4.4@-1982.36,2669.69 -1650.39,2669.69 pad.1@-1587.8,2607.09 ; U4.4@-1973.5,2669.69 -1939.71,2669.69 ; U4.4@-1972.23,2660.48 -1939.71,2669.69 ; U4.4@-1972.23,2678.89 -1939.71,2669.69 ; U4.4@-1966.93,2663.11 cw(c-1951.06,2647.24) -1951.06,2669.69 cw(c-1951.06,2692.13) U4.4@-1966.93,2676.26 ; -1610.74,2630.03 ccw(c-1587.48,2653.29) pad.1@-1587.48,2620.4 ; -1598.79,2618.08 ccw(c-1587.48,2629.39) pad.1@-1587.48,2613.4 ; pad.1@-1593.42,2606.27 -1616.47,2635.76 ; pad.1@-1587.48,2612.09 -1616.47,2635.76 ; pad.1@-1582.97,2619.07 -1616.47,2635.76
  Bottom Layer w7: R7.1@-1700.47,2559.76 -1639.8,2559.76 pad.1@-1587.48,2612.09 ; R7.1@-1699.49,2559.76 -1660.18,2559.76 ; R7.1@-1698.71,2552 -1660.18,2559.76 ; R7.1@-1698.71,2567.53 -1660.18,2559.76 ; R7.1@-1696.7,2545.22 -1660.18,2559.76 ; R7.1@-1696.7,2574.31 -1660.18,2559.76 ; R7.1@-1693.97,2554.24 cw(c-1680.64,2540.92) -1680.64,2559.76 cw(c-1680.64,2578.61) R7.1@-1693.97,2565.28 ; R7.1@-1689.02,2549.29 cw(c-1663.74,2524.02) -1663.74,2559.76 cw(c-1663.74,2595.51) R7.1@-1689.02,2570.23 ; pad.1@-1595.79,2612.09 cw(c-1615.86,2612.09) -1601.67,2597.9 cw(c-1587.48,2583.71) pad.1@-1587.48,2603.78 ; pad.1@-1593.97,2617.28 -1614.14,2585.43 ; pad.1@-1586.43,2603.84 -1554.67,2612.09 pad.1@-1586.43,2620.33 ; pad.1@-1582.29,2605.6 -1614.14,2585.43 ; pad.1@-1581.6,2606.21 cw(c-1567.42,2592.02) -1567.42,2612.09 cw(c-1567.42,2632.15) pad.1@-1581.6,2617.96 ; P5.5@36.57,2305.08 cw(c-11.74,2301.35) 22.52,2267.09 ; P5.5@40.38,2320.76 22.52,2267.09 ; P5.5@43.55,2305.62 cw(c8.23,2302.89) 33.28,2277.85 cw(c58.33,2252.8) P5.5@61.05,2288.12 ; P5.5@46.99,2318.09 22.52,2267.09 ; P5.5@53.16,2314.64 22.52,2267.09 ; P5.5@58.81,2310.48 22.52,2267.09 ; P5.5@60.52,2281.14 ccw(c56.78,2232.83) 22.52,2267.09 ; P5.5@65.91,2303.38 22.52,2267.09 ; P5.5@70.07,2297.73 22.52,2267.09 ; P5.5@73.52,2291.56 22.52,2267.09 ; P5.5@76.2,2284.94 22.52,2267.09 ; -1614.14,2585.43 pad.1@-1587.48,2612.09 ; pad.1@-1587.48,2612.09 -1292.48,2612.09 -1007.48,2327.09 -322.48,2327.09 -262.48,2267.09 22.52,2267.09 ; 22.52,2267.09 P5.5@62.52,2307.09 22.52,2267.09
ENEYE: P18.3 pad.1@-742.5,772.5 pad.1@-1137.5,1277.5 R44.1 R49.2 U17.10 | length 4436.1
  Top Layer w7: R44.1@-783.79,505.49 -769.69,525.31 ; R44.1@-777.39,502.24 -769.69,525.31 ; R44.1@-776.49,514.14 ccw(c-782.27,525.31) -769.69,525.31 ; R44.1@-769.69,500.98 -769.69,525.31 ; R44.1@-768.91,492.23 -730.38,500 ; R44.1@-768.91,507.77 -730.38,500 ; R44.1@-766.9,485.46 -730.38,500 ; R44.1@-766.9,514.54 -730.38,500 ; R44.1@-764.16,494.48 cw(c-750.84,481.15) -750.84,500 cw(c-750.84,518.85) R44.1@-764.16,505.52 ; R44.1@-762.88,514.14 cw(c-757.1,525.31) -769.69,525.31 ; R44.1@-761.98,502.24 -769.69,525.31 ; R44.1@-759.21,489.53 cw(c-733.94,464.25) -733.94,500 cw(c-733.94,535.75) R44.1@-759.21,510.47 ; R44.1@-755.58,505.49 -769.69,525.31 ; pad.1@-747.69,766.01 -715.84,745.84 pad.1@-736.01,777.69 ; pad.1@-742.5,764.19 cw(c-742.5,744.12) -728.31,758.31 cw(c-714.12,772.5) pad.1@-734.19,772.5 ; pad.1@-742.5,772.5 -715,745 -615,745 -545,675 -545,585 -585,545 -750,545 -769.69,525.31 ; R49.2@-680.79,489.53 ccw(c-706.06,464.25) -706.06,500 ccw(c-706.06,535.75) R49.2@-680.79,510.47 ; R49.2@-680.5,488.27 -641.74,461.74 ; R49.2@-680,500 -590,410 -590,-70 -560,-100 -510,-100 -485,-75 -485,-25 -436.22,23.78 P18.3@-436.22,49.28 -465.07,-5.08 ; R49.2@-676.09,493.77 -641.74,461.74 ; R49.2@-675.84,494.48 ccw(c-689.16,481.15) -689.16,500 ccw(c-689.16,518.85) R49.2@-675.84,505.52 ; R49.2@-673.1,485.46 -709.62,500 ; R49.2@-673.1,514.54 -709.62,500 ; R49.2@-671.09,492.23 -709.62,500 ; R49.2@-671.09,507.77 -709.62,500 ; R49.2@-670.32,484.21 cw(c-670.32,469.47) -659.89,479.89 ; R49.2@-670.32,499.02 -641.74,461.74 ; R49.2@-670.32,500 R44.1@-769.69,500 -769.69,525.31 ; R49.2@-663.75,503.23 -641.74,461.74 ; R49.2@-662.51,499.02 ccw(c-622.65,499.02) -650.84,470.84 ; R49.2@-657.29,506.06 -641.74,461.74 ; R49.2@-655.51,499.02 ccw(c-598.76,499.02) -638.89,458.89 ; -472.25,-12.25 ccw(c-507.61,23.11) P18.3@-460.66,40.32 ; -464.5,-4.5 ccw(c-496.27,27.27) P18.3@-454.09,42.73 ; P18.3@-461.27,56.34 -465.07,-5.08 ; -456.75,3.25 ccw(c-484.92,31.42) P18.3@-447.51,45.14 ; P18.3@-454.2,55.49 -465.07,-5.08 ; -449,11 ccw(c-473.58,35.58) P18.3@-440.94,47.55 ; P18.3@-447.34,53.85 -465.07,-5.08 ; -441.25,18.75 ccw(c-462.24,39.74) P18.3@-434.37,49.95 ; P18.3@-440.75,51.45 -465.07,-5.08 ; P18.3@-431.88,46.74 -465.07,-5.08 ; P18.3@-426.2,42.62 -465.07,-5.08 ; P18.3@-421,37.86 -465.07,-5.08 ; P18.3@-416.33,32.49 -465.07,-5.08
  Bottom Layer w7: pad.1@-1145.74,1276.45 -1137.5,1244.69 ; pad.1@-1143.38,1271.62 cw(c-1157.56,1257.44) -1137.5,1257.44 cw(c-1117.44,1257.44) pad.1@-1131.62,1271.62 ; pad.1@-1129.26,1276.45 -1137.5,1244.69 ; pad.1@-750.81,772.5 ccw(c-770.88,772.5) -756.69,786.69 ccw(c-742.5,800.88) pad.1@-742.5,780.81 ; pad.1@-748.99,767.31 -769.16,799.16 ; pad.1@-745,775 -895,925 -1015,925 -1137.5,1047.5 pad.1@-1137.5,1277.5 -1137.5,1244.69 ; pad.1@-742.5,772.5 -769.16,799.16 ; pad.1@-737.31,778.99 -769.16,799.16
ENOLED: pad.1@1207.52,902.09 pad.1@1207.52,1037.09 R19.5 U2.4 | length 883.8
  Top Layer w6: U2.4@1195.95,1199.39 1225.44,1191.68 ; U2.4@1198.05,1205.05 1225.44,1191.68 ; U2.4@1199.92,1204.55 cw(c1199.92,1174) 1221.52,1195.6 ; U2.4@1199.92,1208.35 1225.44,1191.68 ; U2.4@1199.92,1217.2 1227.52,1189.61 1227.52,1067.09 ; pad.1@1200.81,1042.8 1225.96,1065.53 ; U2.4@1202.19,1211.39 1225.44,1191.68 ; U2.4@1206.52,1215.58 1225.44,1191.68 ; pad.1@1210.33,1037.25 cw(c1236.89,1038.82) 1218.07,1057.64 ; pad.1@1215.47,1033.29 1225.96,1065.53 ; pad.1@1216.32,1037.61 cw(c1254.73,1039.88) 1227.52,1067.09 ; 1225.96,1065.53 pad.1@1207.52,1037.09 1207.52,1047.09 1227.52,1067.09
  Bottom Layer w6: pad.1@1198.81,903.39 1207.52,931.9 pad.1@1216.23,903.39 ; pad.1@1198.81,1035.78 1207.52,1007.28 ; pad.1@1201.29,908.32 ccw(c1186.25,923.36) 1207.52,923.36 ccw(c1228.79,923.36) pad.1@1213.75,908.32 ; pad.1@1201.29,1030.86 cw(c1186.25,1015.82) 1207.52,1015.82 cw(c1228.79,1015.82) pad.1@1213.75,1030.86 ; pad.1@1207.52,902.09 pad.1@1207.52,1037.09 1207.52,1007.28 ; pad.1@1216.23,1035.78 1207.52,1007.28
ESCL: P18.2 P27.1 U17.14 | length 4418
  Top Layer w7: U17.14@-1167.56,1600.08 -1084.92,1600.08 -1060,1625 -1000,1625 -945,1680 -310,1680 -275,1715 ; U17.14@-1147.87,1600.08 -1107.19,1600.08 ; U17.14@-1146.84,1590.95 -1107.19,1600.08 ; U17.14@-1146.84,1609.21 -1107.19,1600.08 ; U17.14@-1144.65,1584.22 -1107.19,1600.08 ; U17.14@-1144.65,1615.94 -1107.19,1600.08 ; U17.14@-1141.38,1593.58 cw(c-1125.7,1577.9) -1125.7,1600.08 cw(c-1125.7,1622.25) U17.14@-1141.38,1606.57 ; U17.14@-1136.43,1588.63 cw(c-1108.8,1561) -1108.8,1600.08 cw(c-1108.8,1639.15) U17.14@-1136.43,1611.52 ; P18.2@-350.41,71.1 -291.84,93.65 ; P18.2@-347.48,64.61 -291.84,93.65 ; P18.2@-343.87,58.56 -291.84,93.65 ; P18.2@-339.63,52.97 -291.84,93.65 ; P18.2@-336.22,49.28 -280.5,105 -160,105 -85,180 -85,270 115,470 115,775 50,840 50,880 85,915 85,1120 80,1125 75,1125 50,1150 50,1190 65,1205 90,1205 110,1225 110,1500 50,1560 -15,1560 -211.38,1756.38 P27.1@-278.43,1756.38 ; P18.2@-336.22,68.3 ccw(c-336.22,114.24) -303.74,81.76 ccw(c-271.26,49.28) P18.2@-317.19,49.28 ; P18.2@-336.22,75.3 ccw(c-336.22,138.14) -291.79,93.71 ccw(c-247.36,49.28) P18.2@-310.19,49.28 ; P18.2@-332.53,45.87 -291.84,93.65 ; P18.2@-326.94,41.62 -291.84,93.65 ; P18.2@-320.88,38.02 -291.84,93.65 ; P18.2@-314.4,35.09 -291.84,93.65 ; P27.1@-284.47,1734.3 -275,1715 ; P27.1@-282.6,1731.44 cw(c-297.19,1714.73) -275,1714.73 ; P27.1@-278.43,1736.22 -275,1715 ; P27.1@-277.77,1750.07 -247.58,1756.38 P27.1@-277.77,1762.69 ; P27.1@-275,1750 -275,1715 ; P27.1@-273.94,1751.89 cw(c-263.11,1741.07) -263.11,1756.38 cw(c-263.11,1771.69) P27.1@-273.94,1760.86 ; P27.1@-272.08,1736.3 -275,1715
ESDA: P18.1 P27.2 U17.13 | length 4257.8
  Top Layer w7: U17.13@-1202.04,1515.57 ccw(c-1212.12,1511.09) -1212.12,1522.13 ; U17.13@-1202.04,1528.69 cw(c-1212.12,1533.16) -1212.12,1522.13 ; U17.13@-1192.51,1506.82 -1212.13,1522.13 ; U17.13@-1192.51,1537.43 -1212.13,1522.13 ; U17.13@-1188.94,1513.1 -1212.13,1522.13 ; U17.13@-1188.94,1531.15 -1212.13,1522.13 ; U17.13@-1187.24,1522.13 -1212.13,1522.13 ; U17.13@-1167.56,1522.13 -1212.13,1522.13 ; -335,1710 ccw(c-361.22,1736.22) P27.2@-324.14,1736.22 ; P27.2@-324.01,1777.82 -317.8,1792.2 ; P27.2@-323.24,1739.47 -340.28,1704.72 ; -323.05,1721.95 ccw(c-337.32,1736.22) P27.2@-317.14,1736.22 ; P27.2@-322.28,1781.02 ccw(c-333.11,1791.85) -317.8,1791.85 ccw(c-302.48,1791.85) P27.2@-313.31,1781.02 ; P27.2@-317.8,1736.22 -340.28,1704.72 ; P27.2@-317.8,1756.38 -317.8,1792.2 ; P27.2@-317.8,1776.54 -317.8,1792.2 ; P27.2@-315,1730 -350,1695 -955,1695 -1010,1640 -1220,1640 -1245,1615 -1245,1555 -1212.13,1522.13 ; P27.2@-312.95,1732.12 -340.28,1704.72 ; P27.2@-311.58,1777.82 -317.8,1792.2 ; P18.1@-250,40 -195,40 ; P18.1@-237.16,37.29 -195,40 ; P18.1@-237.03,44.31 -195,40 ; P18.1@-236.22,49.28 -195,40 ; P18.1@-236.11,30.25 -195,40 ; P18.1@-234.83,54.11 -195,40 ; P18.1@-233.84,23.36 -195,40 ; P18.1@-231.94,60.51 -195,40 ; P18.1@-227.97,66.42 -195,40 ; P18.1@-222.96,71.67 -195,40 ; P18.1@-217.82,30.87 cw(c-195.78,8.83) -195.78,40 ; P18.1@-217.42,52.2 ccw(c-203.17,54.42) -203.17,40 ; P18.1@-210.5,53.28 ccw(c-195,55.69) -195,40 ; -317.8,1792.2 -295,1815 -240,1815 -5,1580 60,1580 130,1510 130,1125 155,1100 155,930 128.76,903.76 128.76,453.76 -65,260 -65,170 -195,40
GND: C38.2 C39.2 P15.2 pad.0@194.53,5.08 pad.1@812.52,67.09 pad.1@1072.52,122.09 R31.2 U9.4 U10.3 U11.2 U11.3 | length 8383.3
  Top Layer w7: U10.3@534.61,340 U10.3@534.61,340.35 ; U11.3@749.35,316.74 807.76,301.85 ; U11.3@751.51,323.53 807.76,301.85 ; U11.3@754.43,329.96 807.76,301.85 ; U11.3@758.06,335.97 807.76,301.85 ; U11.3@762.56,327.91 cw(c766.09,290.81) 792.44,317.16 ; U11.3@763.23,320.94 cw(c767.92,271.62) 802.95,306.65 ; U11.3@765.08,344.42 807.76,301.85 ; U11.3@770.32,349.09 807.76,301.85 ; U11.3@776.1,353.15 807.76,301.85 ; U11.3@780.88,340.35 ccw(c808.95,340.35) 789.1,320.51 ; U11.3@782.37,356.52 807.76,301.85 ; U11.3@787.88,340.35 ccw(c832.85,340.35) 801.05,308.56 ; pad.1@812.52,67.09 1017.52,67.09 pad.1@1072.52,122.09 ; pad.1@813.57,58.84 845.33,67.09 pad.1@813.57,75.33 ; pad.1@818.4,61.21 cw(c832.58,47.02) 832.58,67.09 cw(c832.58,87.15) pad.1@818.4,72.96 ; U11.2@861.38,165.35 1064.8,165.35 ; U11.2@861.67,159.86 912.38,165.35 ; U11.2@861.67,170.85 912.38,165.35 ; U11.2@862.91,152.95 912.38,165.35 ; U11.2@862.91,177.76 912.38,165.35 ; U11.2@865.11,146.21 912.38,165.35 ; U11.2@865.11,184.49 912.38,165.35 ; U11.2@868.26,139.76 912.38,165.35 ; U11.2@868.26,190.94 912.38,165.35 ; U11.2@870.22,156.52 cw(c891.56,135.18) 891.56,165.35 cw(c891.56,195.53) U11.2@870.22,174.19 ; U11.2@875.17,151.57 cw(c908.46,118.28) 908.46,165.35 cw(c908.46,212.43) U11.2@875.17,179.14 ; U11.2@880.12,146.62 cw(c925.35,101.38) 925.35,165.35 cw(c925.35,229.33) U11.2@880.12,184.09 ; pad.1@1064.21,122.09 cw(c1044.14,122.09) 1058.33,107.9 cw(c1072.52,93.71) pad.1@1072.52,113.78 ; pad.1@1064.25,121.27 1064.8,157.75 ; 1064.8,143.88 ccw(c1094.31,143.88) pad.1@1073.45,123.01 ; 1064.8,160.78 ccw(c1111.21,160.78) pad.1@1078.4,127.96 ; pad.1@1066.03,127.28 1045.86,95.43 ; pad.1@1077.71,115.6 1045.86,95.43 ; pad.1@1080.39,124.76 1064.8,157.75 ; 1167.03,317.58 ccw(c1218.87,369.42) P15.2@1219.36,296.11 ; 1178.63,305.98 cw(c1142.74,270.08) P15.2@1193.5,270.08 ; 1178.87,305.74 ccw(c1219.02,345.89) P15.2@1219.4,289.11 ; 1190.58,294.03 cw(c1166.63,270.08) P15.2@1200.5,270.08 ; 1190.71,293.9 ccw(c1219.18,322.37) P15.2@1219.45,282.11 ; P15.2@1198.21,255.15 ccw(c1169.53,235.07) 1169.53,270.08 ; P15.2@1198.21,285.01 cw(c1169.53,305.09) 1169.53,270.08 ; P15.2@1198.47,254.78 1173.97,310.64 ; P15.2@1203.94,259.17 ccw(c1182.98,244.49) 1182.98,270.08 ccw(c1182.98,295.67) P15.2@1203.94,280.99 ; P15.2@1204.81,258.01 1173.97,310.64 ; P15.2@1210.68,261.93 1173.97,310.64 ; P15.2@1212.75,244.95 1169.53,270.08 ; P15.2@1212.75,295.21 1169.53,270.08 ; P15.2@1215.91,251.4 1169.53,270.08 ; P15.2@1215.91,288.76 1169.53,270.08 ; P15.2@1216.03,266.46 1173.97,310.64 ; P15.2@1218.08,258.14 1169.53,270.08 ; P15.2@1218.08,282.02 1169.53,270.08 ; P15.2@1219.27,265.06 1169.53,270.08 ; P15.2@1219.27,275.1 1169.53,270.08 ; P15.2@1222.71,273.97 1173.97,310.64 ; P15.2@1226.6,279.81 1173.97,310.64 ; P15.2@1229.81,286.09 1173.97,310.64 ; P15.2@1232.29,292.76 1173.97,310.64 ; 807.76,301.85 U11.3@761.38,340.35 769.25,340.35 809.53,300.08 924.53,300.08 944.53,320.08 1164.53,320.08 1214.53,270.08 1169.53,270.08 ; 1045.86,95.43 pad.1@1072.52,122.09 ; 1064.8,157.75 pad.1@1072.52,122.09 ; 1064.8,165.35 1169.53,270.08 ; 1064.8,165.35 1064.8,129.8 pad.1@1072.52,122.09 ; 1169.53,270.08 P15.2@1219.53,270.08 1173.97,310.64
  Bottom Layer w7: pad.0@177.79,25.62 232.87,53.42 ; pad.0@181.36,19.46 232.87,53.42 ; pad.0@185.57,13.8 232.87,53.42 ; pad.0@190.38,8.69 232.87,53.42 ; pad.0@194.53,5.08 232.87,53.42 ; pad.0@194.53,24.58 ccw(c194.53,47.51) 210.75,31.3 ; pad.0@194.53,31.58 ccw(c194.53,71.41) 222.69,43.25 ; pad.0@198.98,1.86 232.87,53.42 ; pad.0@200.03,5.08 cw(c237.45,5.08) 210.99,31.54 ; pad.0@204.53,5.08 204.53,25.08 264.53,85.08 U9.4@410.04,85.08 ; pad.0@205.06,-1.66 232.87,53.42 ; pad.0@207.03,5.08 cw(c261.35,5.08) 222.94,43.49 ; pad.0@211.53,-4.47 232.87,53.42 ; pad.0@214.03,5.08 cw(c285.25,5.08) 234.89,55.44 ; pad.0@218.34,-6.55 232.87,53.42 ; pad.0@221.03,5.08 cw(c309.15,5.08) 246.84,67.39 ; U9.4@362.67,79.2 ccw(c348.48,65.01) 348.48,85.08 ccw(c348.48,105.14) U9.4@362.67,90.96 ; U9.4@367.49,76.83 335.73,85.08 ; U9.4@367.49,93.32 335.73,85.08 ; U9.4@368.54,85.08 335.73,85.08 ; C39.2@395.51,340.39 434.82,340.39 ; C39.2@396.29,332.63 434.82,340.39 ; C39.2@396.29,348.16 434.82,340.39 ; C39.2@398.3,325.85 434.82,340.39 ; C39.2@398.3,354.94 434.82,340.39 ; C39.2@401.03,334.87 cw(c414.36,321.55) 414.36,340.39 cw(c414.36,359.24) C39.2@401.03,345.91 ; C39.2@404.53,340.39 U10.3@544.57,340.39 ; C39.2@405.98,329.92 cw(c431.26,304.65) 431.26,340.39 cw(c431.26,376.14) C39.2@405.98,350.86 ; U9.4@424.53,85.08 459.53,120.08 459.53,340.39 ; U9.4@425.5,90.79 448.29,108.84 ; U9.4@431.54,85.08 448.29,108.84 ; U9.4@432.85,85.08 cw(c452.93,85.08) 438.73,99.28 ; U9.4@438.94,81.31 448.29,108.84 ; U9.4@439.85,85.08 cw(c476.83,85.08) 450.68,111.23 ; 470.53,340.39 cw(c470.53,276.28) U10.3@515.87,321.62 ; 470.72,340.39 ccw(c470.72,404.24) U10.3@515.87,359.09 ; 487.43,340.39 cw(c487.43,293.18) U10.3@520.82,326.57 ; 487.62,340.39 ccw(c487.62,387.34) U10.3@520.82,354.14 ; 504.33,340.39 cw(c504.33,310.08) U10.3@525.77,331.52 ; 504.52,340.39 ccw(c504.52,370.44) U10.3@525.77,349.19 ; U10.3@524.88,365.01 583.23,373.78 ; U10.3@526.37,358.03 583.23,373.78 ; U10.3@527.7,314.77 483.61,340.39 ; U10.3@527.74,365.95 483.61,340.39 ; U10.3@528.66,351.35 583.23,373.78 ; U10.3@530.86,321.22 483.61,340.39 ; U10.3@530.89,359.5 483.61,340.39 ; U10.3@531.71,345.03 583.23,373.78 ; U10.3@533.06,327.95 483.61,340.39 ; U10.3@533.08,352.76 483.61,340.39 ; U10.3@534.31,334.86 483.61,340.39 ; U10.3@534.31,345.85 483.61,340.39 ; U10.3@535.86,345.71 ccw(c542.45,373.79) 562.85,353.4 ; U10.3@537.46,352.52 ccw(c545.83,388.2) 571.74,362.29 ; U10.3@537.93,335.97 583.23,373.78 ; U10.3@539.06,359.34 ccw(c549.2,402.61) 580.63,371.18 ; U10.3@540.66,366.15 ccw(c552.58,417.02) 589.53,380.08 ; U10.3@542.74,330.86 583.23,373.78 ; U10.3@544.61,340.35 549.8,340.35 589.53,380.08 ; U10.3@548.16,326.33 583.23,373.78 ; U10.3@554.14,322.45 583.23,373.78 ; U10.3@561.11,340.35 cw(c588.39,340.35) 569.1,359.65 ; U11.3@734.98,338 744.53,380.08 ; U11.3@742.17,336.99 744.53,380.08 ; 746.12,378.48 cw(c727.26,359.62) U11.3@750.49,346.5 ; U11.3@749.28,337.19 744.53,380.08 ; 752.64,371.97 cw(c735.59,354.91) U11.3@756.59,343.06 ; U11.3@756.19,338.53 744.53,380.08 ; U11.3@761.38,340.35 744.53,380.08 ; U11.3@766.29,342.82 744.53,380.08 ; U11.3@772.06,346.85 744.53,380.08 ; U11.3@777.14,351.83 744.53,380.08 ; U11.3@779.53,345.08 744.53,380.08 ; U11.3@781.42,357.69 744.53,380.08 ; 483.61,340.39 U10.3@534.61,340.35 583.23,373.78 ; 589.53,380.08 744.53,380.08